# Altium PCB JacdacEc30TemplateRnd20x20+1+0 107.PcbDoc
Units mm, origin at the board's own origin, x right, y up, seen from the top; angles counter-clockwise.
Board outline 26.5 x 25 mm, 2 copper layers (Top Layer, Bottom Layer), stack 1.525 mm thick; 8 components, 3 nets, 30 pads, 1 vias.
Unrouted connection lines stored in the file: 9.
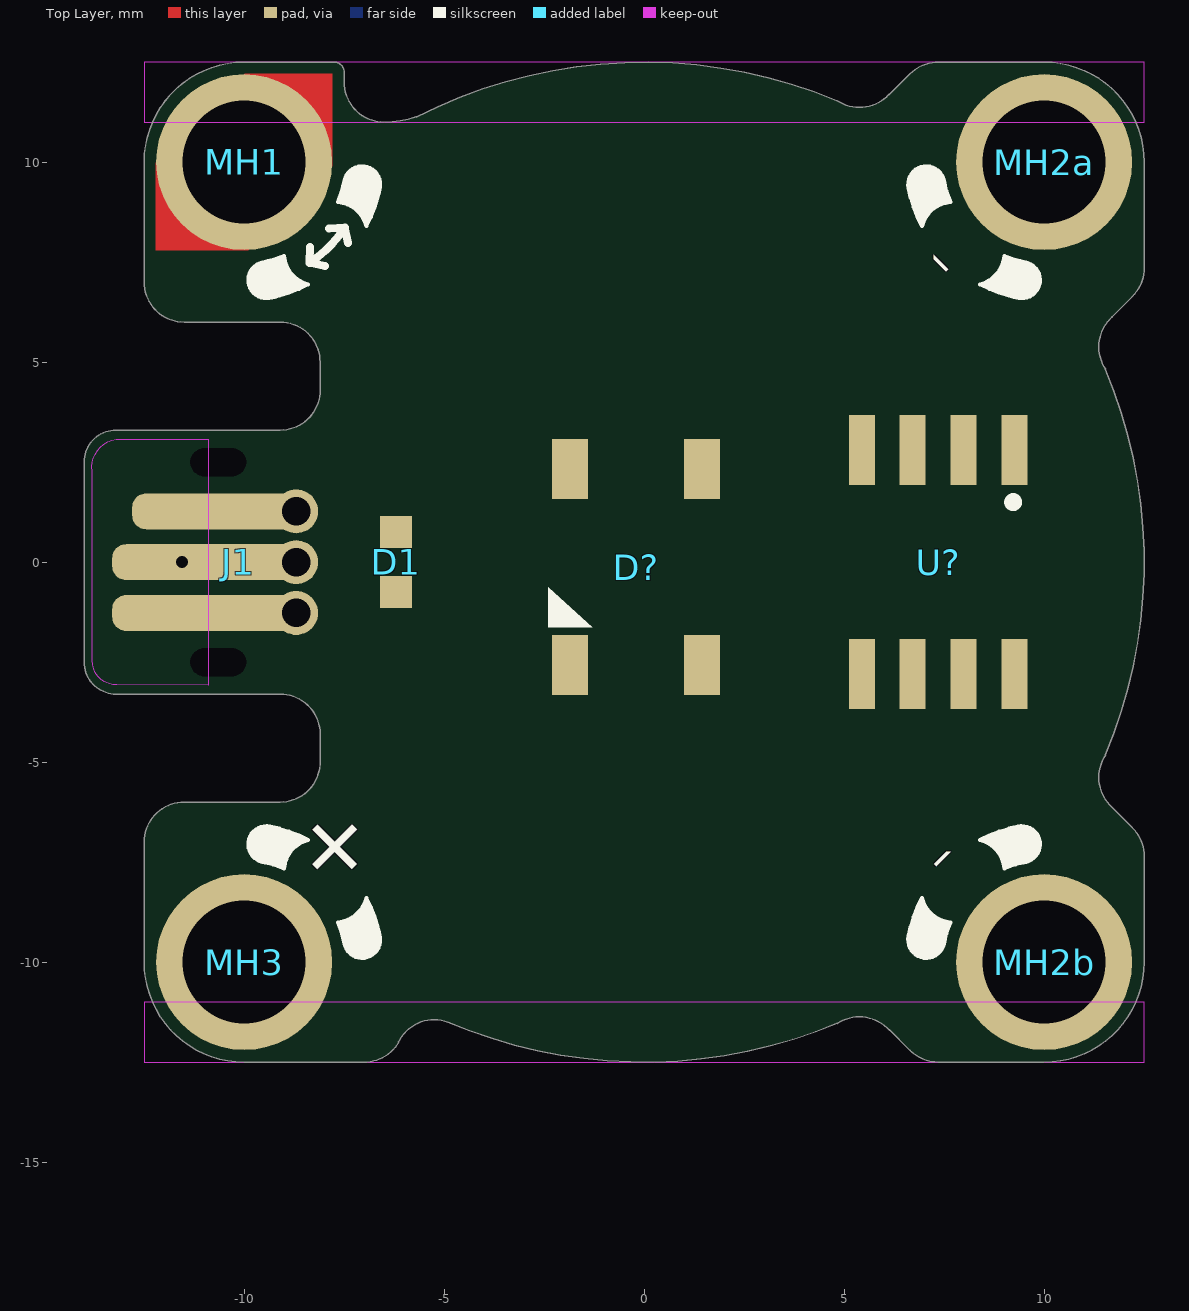
[diagram p0: Top Layer view]
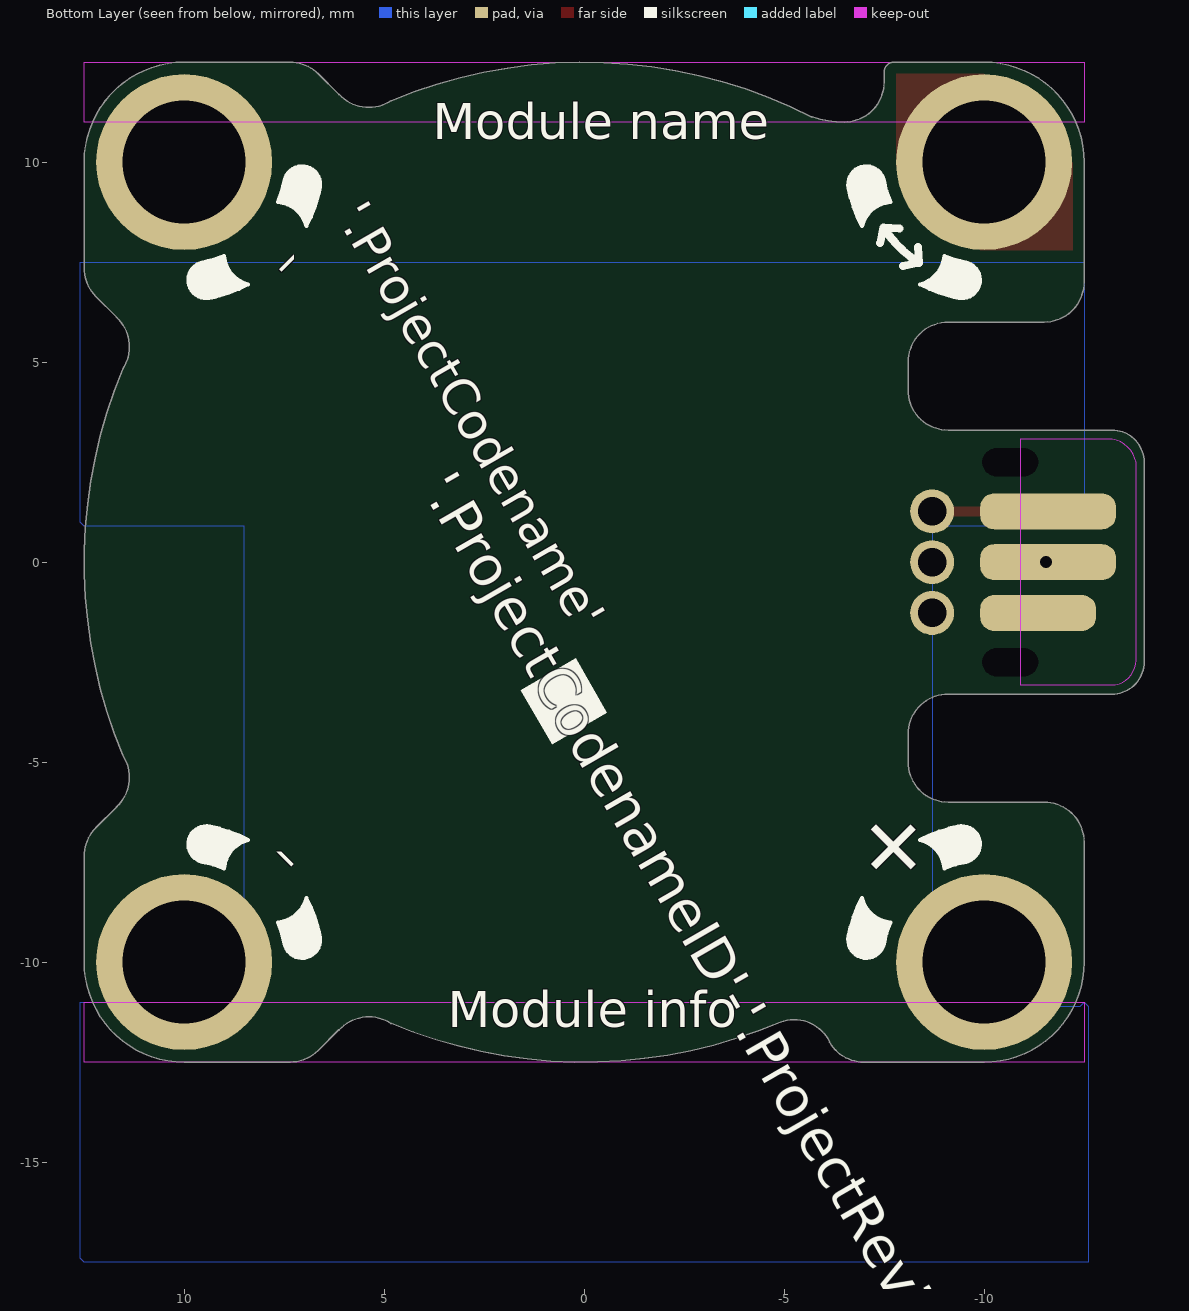
[diagram p1: Bottom Layer view, seen from below]
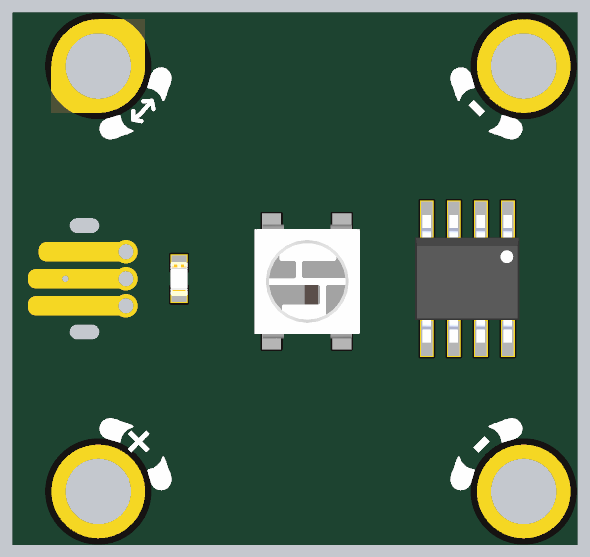
[diagram p2: 3D render of the assembled board from above, using the file's embedded part models]

## Layer stack, top to bottom
Top Solder: solder mask 0.0102, Solder Resist, Dk 3.5
Top Layer: signal copper 0.0356
Dielectric 1: core 1.454, FR-4, Dk 4.2
Bottom Layer: signal copper 0.0356
Bottom Solder: solder mask 0.0102, Solder Resist, Dk 3.5

## Board outline
-12.5,-7 cw(c-11.5,-7) -11.5,-6 -9.1,-6 ccw(c-9.1,-5) -8.1,-5 -8.1,-4.3 ccw(c-9.1,-4.3) -9.1,-3.3 -13.2,-3.3 cw(c-13.2,-2.5) -14,-2.5 -14,2.5 cw(c-13.2,2.5) -13.2,3.3 -9.1,3.3 -9.098,3.3 ccw(c-9.098,4.3) -8.098,4.3 -8.1,4.3 -8.1,5 ccw(c-9.1,5) -9.1,6 -11.5,6 cw(c-11.5,7) -12.5,7 -12.5,10 cw(c-10,10) -10,12.5 -7.75,12.5 cw(c-7.75,12.25) -7.5,12.25 -7.5,12 ccw(c-6.5,12) -6.5,11 ccw(c-6.5,13.5) -5.7,11.131 -5.698,11.126 cw(c0,0) 4.814,11.536 4.825,11.537 ccw(c5.383,12.367) 6.126,11.698 6.13,11.689 6.648,12.207 6.649,12.207 cw(c7.356,11.5) 7.356,12.5 7.35,12.5 10,12.5 cw(c10,10) 12.5,10 12.5,7.35 cw(c11.5,7.35) 12.207,6.643 11.694,6.13 11.698,6.126 ccw(c12.367,5.383) 11.537,4.825 11.532,4.823 cw(c0,0) 11.532,-4.823 11.537,-4.825 ccw(c12.367,-5.383) 11.698,-6.126 11.694,-6.13 12.207,-6.643 cw(c11.5,-7.35) 12.5,-7.35 12.5,-10 cw(c10,-10) 10,-12.5 7.35,-12.5 7.356,-12.5 cw(c7.356,-11.5) 6.649,-12.207 6.648,-12.207 6.133,-11.691 6.126,-11.698 ccw(c5.383,-12.367) 4.825,-11.537 4.823,-11.532 cw(c0,0) -4.904,-11.498 -4.905,-11.498 ccw(c-5.245,-12.438) -6.142,-11.996 -6.134,-12 cw(c-7,-11.5) -7,-12.5 -10,-12.5 cw(c-10,-10) -12.5,-10

## Design rules (kind name [scope] priority, off if disabled: settings)
AssemblyTestPointUsage [All] p1: valid=2
BoardOutlineClearance [not (HasFootprint('MOUSEBITE_CONNECTOR_3X2') or HasFootprint('MOUSEBITE_NOCONNECTOR_3'))] p1: gap=0.3 ignorepadtopadclearanceinfootprint=FALSE except(0: Arc-SplitContinuation Track-SplitContinuation SMDPad-SplitContinuation THPad-SplitContinuation Via-SplitContinuation Fill-SplitContinuation Poly-SplitContinuation Text-OutlineEdge Text-CavityEdge Text-CutoutEdge Text-SplitBarrior Text-SplitContinuation; 0.15: Region-OutlineEdge Region-CavityEdge Region-CutoutEdge Region-SplitBarrior Region-SplitContinuation)
Clearance [not (IsPad and HasFootprint('MOUSEBITE_CONNECTOR_3X2'))] p1: gap=0.15 ignorepadtopadclearanceinfootprint=FALSE except(0.254: Arc-Hole Track-Hole SMDPad-Hole THPad-Hole Via-Hole Fill-Hole Poly-Hole Region-Hole Text-Hole)
ComponentClearance [All] p1: gap=0.01 collisioncheckmode=3 verticalgap=0.2 showdistances=FALSE
DiffPairsRouting [All] p1: maxlimit=2 minlimit=0.15 mostfreqgap=0.15 toplayer_minwidth=0.15 toplayer_maxwidth=2 toplayer_prefwidth=0.15 bottomlayer_minwidth=0.15 bottomlayer_maxwidth=2 bottomlayer_prefwidth=0.15 substack1={CB9D278B-8BF5-444A-AAF4-837A2A9DF42D} toplayer_{cb9d278b-8bf5-444a-aaf4-837a2a9df42d}_minwidth=0.381 toplayer_{cb9d278b-8bf5-444a-aaf4-837a2a9df42d}_maxwidth=0.381 toplayer_{cb9d278b-8bf5-444a-aaf4-837a2a9df42d}_prefwidth=0.381 bottomlayer_{cb9d278b-8bf5-444a-aaf4-837a2a9df42d}_minwidth=0.381 bottomlayer_{cb9d278b-8bf5-444a-aaf4-837a2a9df42d}_maxwidth=0.381 bottomlayer_{cb9d278b-8bf5-444a-aaf4-837a2a9df42d}_prefwidth=0.381 substack2={826B8647-A721-4255-895A-19F9591B9CD1} toplayer_{826b8647-a721-4255-895a-19f9591b9cd1}_minwidth=0.381 toplayer_{826b8647-a721-4255-895a-19f9591b9cd1}_maxwidth=0.381 toplayer_{826b8647-a721-4255-895a-19f9591b9cd1}_prefwidth=0.381 bottomlayer_{826b8647-a721-4255-895a-19f9591b9cd1}_minwidth=0.381 bottomlayer_{826b8647-a721-4255-895a-19f9591b9cd1}_maxwidth=0.381 bottomlayer_{826b8647-a721-4255-895a-19f9591b9cd1}_prefwidth=0.381 substack3={E64FCAF4-1BC8-437D-B1E0-0E5F2DC0F59E} toplayer_{e64fcaf4-1bc8-437d-b1e0-0e5f2dc0f59e}_minwidth=0.381 toplayer_{e64fcaf4-1bc8-437d-b1e0-0e5f2dc0f59e}_maxwidth=0.381 toplayer_{e64fcaf4-1bc8-437d-b1e0-0e5f2dc0f59e}_prefwidth=0.381 bottomlayer_{e64fcaf4-1bc8-437d-b1e0-0e5f2dc0f59e}_minwidth=0.381 bottomlayer_{e64fcaf4-1bc8-437d-b1e0-0e5f2dc0f59e}_maxwidth=0.381 bottomlayer_{e64fcaf4-1bc8-437d-b1e0-0e5f2dc0f59e}_prefwidth=0.381 substack4={E61CE66C-507C-4E1E-8E83-C905434AFC1C} toplayer_{e61ce66c-507c-4e1e-8e83-c905434afc1c}_minwidth=0.381 toplayer_{e61ce66c-507c-4e1e-8e83-c905434afc1c}_maxwidth=0.381 toplayer_{e61ce66c-507c-4e1e-8e83-c905434afc1c}_prefwidth=0.381 bottomlayer_{e61ce66c-507c-4e1e-8e83-c905434afc1c}_minwidth=0.381 bottomlayer_{e61ce66c-507c-4e1e-8e83-c905434afc1c}_maxwidth=0.381 bottomlayer_{e61ce66c-507c-4e1e-8e83-c905434afc1c}_prefwidth=0.381 maxuncoupledlength=25
FabricationTestPointUsage [All] p1: valid=2 allowmultiple=FALSE
HoleSize [All] p1: absolutevalues=TRUE maxlimit=5 minlimit=0.3 maxpercent=80.000 minpercent=20.000
HoleToHoleClearance [IsPad and not (HasFootprint('MOUSEBITE_CONNECTOR_3X2') or HasFootprint('MOUSEBITE_NOCONNECTOR_3')) vs IsPad and not  (HasFootprint('MOUSEBITE_CONNECTOR_3X2') or HasFootprint('MOUSEBITE_NOCONNECTOR_3'))] p1: gap=0.5 allowstackedmicrovias=TRUE
MinimumAnnularRing [All] p1: minimumring=0.15
MinimumSolderMaskSliver [All] p1: minsoldermaskwidth=0.005
PlaneClearance [All] p1: clearance=0.3
PlaneConnect [All] p1: planeconnectstyle=Relief reliefexpansion=0.5 reliefentries=4 reliefconductorwidth=0.2 reliefairgap=0.3
PolygonConnect "PolygonConnect GND" [isVIA] p1: connectstyle=Relief reliefconductorwidth=0.2 reliefentries=4 polygonreliefangle="90 Angle" airgapwidth=0.2
PolygonConnect [All] p2: connectstyle=Relief reliefconductorwidth=0.2 reliefentries=4 polygonreliefangle="90 Angle" airgapwidth=0.2
RoutingVias [All] p1: holewidth=0.3 width=0.6 viastyle="Through Hole" minholewidth=0.3 minwidth=0.6 maxholewidth=0.3 maxwidth=0.8
SilkToSilkClearance [All] p1: silktosilkclearance=0.001
SilkToSolderMaskClearance [IsPad] p1: minsilkscreentomaskgap=0.05 clearancetoexposedcopper=TRUE
SolderMaskExpansion [All] p1: expansion=0.075 istentingtop=FALSE
UnRoutedNet [All] p1: checkbadconnections=TRUE
Width [All] p1: maxlimit=2 minlimit=0.15 preferedwidth=0.15 substack1={CB9D278B-8BF5-444A-AAF4-837A2A9DF42D} substack2={826B8647-A721-4255-895A-19F9591B9CD1} substack3={E64FCAF4-1BC8-437D-B1E0-0E5F2DC0F59E} substack4={E61CE66C-507C-4E1E-8E83-C905434AFC1C} minimp=50.000000 maximp=50.000000 favimp=50.000000
18 further rules are at their usual default settings.

## Classes and differential pairs
component class "JacdacEc30Template30x30 105": D1 J1 MH1 MH2a MH2b MH3 U?

## Components (designator, comment, footprint, x,y, rotation, side; value= is the part's Value field where it differs from the comment)
D1 "Everlight Elec'''" "0603 Orange" -6.2,0 r270 top
D? "WS2812E" WS2812E-5050 -0.2,-0.125 r270 top
J1 "Jacdac edge connector" JACDAC_EDGE_CONNECTOR_NO_TRACES_V2DIMS -8.15,0 r90 top
MH1 "MH_6.5MMK_4.5MMC_3.0MMD_PTH" MH_6.5MMK_4.5MMC_3.0MMD_PTH -10,10 r90 top
MH2a "MH_6.5MMK_4.5MMC_3.0MMD_PTH" MH_6.5MMK_4.5MMC_3.0MMD_PTH 10,10 r90 top
MH2b "MH_6.5MMK_4.5MMC_3.0MMD_PTH" MH_6.5MMK_4.5MMC_3.0MMD_PTH 10,-10 r90 top
MH3 "MH_6.5MMK_4.5MMC_3.0MMD_PTH" MH_6.5MMK_4.5MMC_3.0MMD_PTH -10,-10 r90 top
U? "STM32G031J6M6" 8-SOIC 7.35,0 r270 top

## Footprints (in the part's own frame and the unit in brackets; to place one, negate y for a bottom-side part, rotate by r counter-clockwise, add the part's x,y. Pads: shape width x height; smd on the part's side, far side on the other; paste and mask are expansions set on the pad)
8-SOIC [mm] "0.154\", 3.90mm Width"
  rect 1.75x0.65 smd paste-0.05: 1(-2.8,1.905) 2(-2.8,0.635) 3(-2.8,-0.635) 4(-2.8,-1.905) 5(2.8,-1.905) 6(2.8,-0.635) 7(2.8,0.635) 8(2.8,1.905)
  silkscreen extent -1.6,1.78 -1.4,1.97, body extent -3,-2.45 3,2.45, height 1.75
"0603 Orange" [mm]
  rect 0.8x0.8 smd paste-0.05: 1(-0.75,0) 2(0.75,0)
  body extent -0.79,-0.4 0.81,0.4, height 0.4
JACDAC_EDGE_CONNECTOR_NO_TRACES_V2DIMS [mm] "Jacdac 3 pin connector with no traces and new slot definition"
  rrect78% 0.9x2.9 smd far side paste-1 mask+0: 1(-1.27,3.2)
  rrect78% 0.9x4.3 smd paste-1 mask+0: 1(1.27,2.5)
  round 1.1 hole 0.71 paste-0.254 mask+0: 1(1.27,0.55) 2(0,0.55) 3(-1.27,0.55)
  rrect78% 0.9x3.4 smd far side paste-1 mask+0: 2(0,3.45) 2(0,3.45) 3(1.27,3.45)
  rrect78% 0.9x4.8 smd paste-1 mask+0: 2(0,2.75) 3(-1.27,2.75)
  round 0 hole 0.7 slot 1.4 at 90 deg unplated: ""(-2.5,2.5) ""(2.5,2.5)
  Top Layer keep-out region: -3.075,2.75 -3.07,5.033 -2.987,5.341 -2.761,5.567 -2.453,5.65 -2.453,5.65 2.27,5.65 2.545,5.635 2.794,5.516 2.978,5.31 3.07,5.05 3.07,5.05 3.07,2.75
  Bottom Layer lines w0.2: -1.27,0.85 -1.126,0.85
  Bottom Layer keep-out region: -3.07,2.75 -3.07,5.033 -3.023,5.269 -2.889,5.469 -2.689,5.603 -2.453,5.65 -2.453,5.65 2.27,5.65 2.546,5.635 2.794,5.516 2.978,5.31 3.07,5.05 3.07,5.05 3.07,2.75
MH_6.5MMK_4.5MMC_3.0MMD_PTH [mm] "Jacdac mounting hole 6.5mm clearance, 4.5 annualar ring and 3.0mm PTH"
  round 4.4 hole 3.08 mask+0.3: 1(0,0)
WS2812E-5050 [mm] "SMD-5050 Light Emitting Diodes"
  rect 1.5x0.9 smd: 1(-2.45,1.65) 2(-2.45,-1.65) 3(2.45,-1.65) 4(2.45,1.65)
  silkscreen extent 0.5,-2.2 1.5,-1.1, body extent -2.68,-2.45 2.67,2.5, height 1.5

## Part data
D1: library part 19-217/S2C-AQ1R1B/3T, "LED ORANGE DIFFUSED 0603 SMD", Case Code (Imperial)=0603, Color=Orange, Manufacturer="Everlight Elec", Supplier 1 Part Number=C146215, Case/Package=0603, Colour=Orange, ComponentLink1Description="Online datasheet", ComponentLink1URL=https://datasheet.lcsc.com/lcsc/1912171731_Everlight-Elec-19-217-S2C-AQ1R1B-3T_C146215.pdf, Manufacturer Part Number=19-217/S2C-AQ1R1B/3T, Mount="Surface Mount", Supplier 1=LCSC
D?: library part WS2812E-5050, "WS2812E 5050 RGB LED WITH INTEGRATED DRIVER", Color=Blue,Green,Red, Manufacturer=Worldsemi, Supplier 1 Part Number 3=C139127, Category=LEDs, ComponentLink1Description="Online datasheet", ComponentLink1URL=https://datasheet.lcsc.com/lcsc/1811151230_Worldsemi-WS2812E_C139127.pdf, Length=5mm, Manufacturer Part Number=WS2812E, Mount="Surface Mount", RoHS=Yes, Supplier 1=LCSC, Width=5mm
J1: "3 pin Jacdac edge connector 1.27mm pitch", Manufacturer Part Number=JACDAC_EDGE_CONNECTOR, Checked By=?, ComponentLink1Description="Yuliang JACDAC cable connector drawing online", ComponentLink1URL=https://github.com/microsoft/jacdac-mdk/blob/main/connector/JACDAC-Connector-by-Yuliang-2020-11-28.pdf, ComponentLink2Description="JACDAC PCB edge connector spec onlin", ComponentLink2URL=https://github.com/microsoft/jacdac-mdk/blob/main/connector/JACDAC_PCB_Edge_Connector_Drawing_JD-PEC-01_rev_01.pdf, Created By="D. Gakure", PCB Type="1.6mm FR4"
MH1 MH2a MH2b MH3: "Mounting Hole 6.5mm keepout, 4.5mm annualar ring and 3.0mm Drill PTH"
U?: "MCU 32-bit ARM Cortex M0+ RISC 32KB Flash 2.5V/3.3V 8-Pin SO N Tube", Manufacturer=STMicroelectronics, Supplier Part Number 1=497-19552-ND, Category=Microcontrollers, Checked By=?, ComponentLink1Description="Online datasheet", ComponentLink1URL=https://www.st.com/resource/en/datasheet/stm32g031c6.pdf, Created By="D. Gakure", Manufacturer Part Number=STM32G031J6M6, Pricing 1="1=1.80000, 10=1.61600, 25=1.52480, 100=1.29920, 250=1.21992, 500=1.06744, 1000=0.88952 (USD)", Pricing 2="1=1.91000, 25=1.70000, 75=1.63000, 150=1.59000, 400=1.53000 (USD)", Pricing 3="1=1.50000, 10=1.28000, 50=1.28000, 100=1.09000, 1000=0.73700, 10000=0.71100 (USD)", RoHS=Yes, Supplier 1=Digi-Key, Supplier 2="Future Electronics", Supplier 3=Mouser, Supplier Part Number 2=2116576, Supplier Part Number 3=511-STM32G031J6M6

## Via types
v1: diameter 0.6, hole 0.3, Top Layer to Bottom Layer, tented both sides, 1 vias

## Nets (pads, with @x,y where several pads share a name; then routed paths per layer and width w, separated by ;. In a path a pad name is that pad's centre, name@x,y a point inside that pad or via, vN(x,y) a via of type N, cw(c..) or ccw(c..) an arc to the next point about the centre after c; other vN are vias at no path point)
GND: J1.2 MH2a.1 MH2b.1
  other v1: -11.55,0
JD_DATA: J1.1 MH1.1 | length 2
  Top Layer w0.25: J1.1@-10.65,1.27 J1.1@-8.7,1.27
JD_PWR: J1.3 MH3.1
pads on no net: D1.1 D1.2 D?.1 D?.2 D?.3 D?.4 J1. U?.1 U?.2 U?.3 U?.4 U?.5 U?.6 U?.7 U?.8

## Polygon pours and split planes (outlines as drawn)
no net on Bottom Assy "NONET_L-01_P-001" (solid): 10,7.8 ccw(c10,10) 12.2,10 ccw(c10,10) 10,12.2 ccw(c10,10) 7.8,10 ccw(c10,10)
no net on Bottom Assy "NONET_L-01_P-001" (solid): 10,-12.2 ccw(c10,-10) 12.2,-10 ccw(c10,-10) 10,-7.8 ccw(c10,-10) 7.8,-10 ccw(c10,-10)
no net on Bottom Assy "NONET_L-01_P-001" (solid): -10,7.8 ccw(c-10,10) -7.8,10 ccw(c-10,10) -10,12.2 ccw(c-10,10) -12.2,10 ccw(c-10,10)
no net on Bottom Assy "NONET_L-01_P-001" (solid): -12.449,-0.82 ccw(c-12.449,-1.171) -12.8,-1.171 -12.8,-1.369 ccw(c-12.449,-1.369) -12.449,-1.72 -9.016,-1.72 ccw(c-8.7,-1.27) -9.016,-0.82
no net on Bottom Assy "NONET_L-01_P-001" (solid): -12.949,-0.82 ccw(c-12.949,-1.171) -13.3,-1.171 -13.3,-1.369 ccw(c-12.949,-1.369) -12.949,-1.72 -9.016,-1.72 ccw(c-8.7,-1.27) -9.016,-0.82
no net on Bottom Assy "NONET_L-01_P-001" (solid): -12.949,-0.82 ccw(c-12.949,-1.171) -13.3,-1.171 -13.3,-1.369 ccw(c-12.949,-1.369) -12.949,-1.72 -9.016,-1.72 ccw(c-8.7,-1.27) -9.016,-0.82
no net on Bottom Assy "NONET_L-01_P-001" (solid): -10,-12.2 ccw(c-10,-10) -7.8,-10 ccw(c-10,-10) -10,-7.8 ccw(c-10,-10) -12.2,-10 ccw(c-10,-10)
no net on Bottom Assy "NONET_L-01_P-001" (solid): -9.9,7.8 -7.8,9.9 -7.8,12.215 -9.985,12.215 -12.215,9.985 -12.215,7.8
no net on Bottom Assy "NONET_L-01_P-001" (hatched 45Degree grid 0.3 track 0.01): -12.5,-10 -12.5,-7.018 -12.5,-7 cw(c-11.5,-7) -11.5,-6 -9.1,-6 ccw(c-9.1,-5) -8.1,-5 -8.1,-4.3 ccw(c-9.1,-4.3) -9.1,-3.3 -13.2,-3.3 cw(c-13.2,-2.5) -14,-2.5 -14,2.5 cw(c-13.2,2.5) -13.2,3.3 -9.1,3.3 ccw(c-9.1,4.3) -8.1,4.3 -8.1,5 ccw(c-9.1,5) -9.1,6 -11.5,6 cw(c-11.5,7) -12.5,7 -12.5,7.003 -12.5,10 cw(c-10,10) -10,12.5 -7.729,12.5 -7.75,12.5 cw(c-7.75,12.25) -7.5,12.25 -7.5,12 ccw(c-6.5,12) -6.656,11.012 -6.65,11.015 cw(c-10,10) -7,8.197 -7,-8.197 cw(c-10,-10) -6.646,-11 6.646,-11 cw(c10,-10) 12.503,-7.554 12.5,-7.554 12.5,-10 cw(c10,-10) 10,-12.5 -7.729,-12.5 -10,-12.5 cw(c-10,-10)
no net on Bottom Assy "NONET_L-01_P-001" (hatched 45Degree grid 0.3 track 0.01): -6.5,11 ccw(c-6.5,12) -5.5,12 -5.5,12.25 cw(c-5.25,12.25) -5.25,12.5 10,12.5 cw(c10,10) 12.5,10 12.5,7.554 12.503,7.554 cw(c10,10) 6.646,11
no net on Bottom Assy "NONET_L-01_P-001" (hatched 45Degree grid 0.3 track 0.01, shelved): 10,-17.5 ccw(c10,-15) 12.5,-15 12.5,-11.974 ccw(c11.5,-11.974) 11.5,-10.974 9.148,-10.974 9.15,-10.975 cw(c9.15,-9.975) 8.15,-9.975 8.15,-9.974 8.15,-9.274 cw(c9.15,-9.274) 9.15,-8.274 9.148,-8.274 13.198,-8.274 13.2,-8.274 ccw(c13.2,-7.474) 14,-7.474 14,-2.534 ccw(c13.2,-2.534) 13.2,-1.734 9.15,-1.734 cw(c9.15,-0.734) 8.15,-0.734 8.15,-0.034 cw(c9.15,-0.034) 9.15,0.966 11.5,0.966 ccw(c11.5,1.966) 12.5,1.966 12.5,5 ccw(c10,5) 10,7.5 -5.225,7.5 -5.25,7.5 ccw(c-5.25,7.25) -5.5,7.25 -5.5,7 cw(c-6.5,7) -6.5,6 6.646,6 ccw(c10,5) 7,3.197 7,-13.197 ccw(c10,-15) 6.646,-16 -6.646,-16 ccw(c-10,-15) -7,-13.197 -7,3.197 ccw(c-10,5) -6.65,6.015 -6.656,6.012 cw(c-6.5,7) -7.5,7 -7.5,7.25 ccw(c-7.75,7.25) -7.75,7.5 -7.729,7.5 -10,7.5 ccw(c-10,5) -12.5,5 -12.5,1.974 ccw(c-11.5,1.974) -11.5,0.974 -9.148,0.974 cw(c-9.148,-0.026) -8.148,-0.026 -8.15,-0.726 cw(c-9.15,-0.726) -9.15,-1.726 -9.148,-1.726 -13.198,-1.726 -13.2,-1.726 ccw(c-13.2,-2.526) -14,-2.526 -14,-7.47 -14,-7.474 ccw(c-13.2,-7.474) -13.2,-8.274 -13.198,-8.274 -9.148,-8.274 -9.15,-8.274 cw(c-9.15,-9.274) -8.15,-9.274 -8.148,-9.97 -8.148,-9.974 cw(c-9.148,-9.974) -9.148,-10.974 -11.5,-10.974 ccw(c-11.5,-11.974) -12.5,-11.974 -12.5,-15 ccw(c-10,-15) -10,-17.5 -7.729,-17.5
no net on Bottom Assy "NONET_L-01_P-001" (solid): 10,7.8 cw(c10,10) 7.8,10 cw(c10,10) 10,12.2 cw(c10,10) 12.2,10 cw(c10,10)
no net on Bottom Assy "NONET_L-01_P-001" (solid): 10,-12.2 cw(c10,-10) 7.8,-10 cw(c10,-10) 10,-7.8 cw(c10,-10) 12.2,-10 cw(c10,-10)
no net on Bottom Assy "NONET_L-01_P-001" (solid): -10,-12.2 ccw(c-10,-10) -7.8,-10 ccw(c-10,-10) -10,-7.8 ccw(c-10,-10) -12.2,-10 ccw(c-10,-10)
no net on Bottom Assy "NONET_L-01_P-001" (solid): -10,7.8 ccw(c-10,10) -7.8,10 ccw(c-10,10) -10,12.2 ccw(c-10,10) -12.2,10 ccw(c-10,10)
no net on Bottom Layer "NONET_L02_P000" (solid, shelved, pour order 0): -12.5,7.5 -12.5,0.9 -8.724,0.9 -8.675,0.851 -8.7,0.826 -8.7,-11.1 -12.4,-11.1 -12.5,-11 -12.6,-11.1 -12.6,-17.5 12.5,-17.5 12.6,-17.4 12.6,-11 8.7,-11 8.5,-10.8 8.5,0.9 12.5,0.9 12.6,1 12.6,7.5
no net on Bottom Assy "NONET_L-01_P-001" (hatched 45Degree grid 0.15 track 0.01): -13.6,-2.468 ccw(c-13.2,-2.468) -13.2,-2.868 -9.3,-2.868 -9.3,2.874 -13.198,2.874 -13.2,2.874 ccw(c-13.2,2.474) -13.6,2.474 -13.6,2.477
no net on Bottom Assy "NONET_L-01_P-001" (hatched 45Degree grid 0.15 track 0.01): -12.5,8.342 ccw(c-10,10) -8.342,12.5 -10,12.5 ccw(c-10,10) -12.5,10
no net on Bottom Assy "NONET_L-01_P-001" (hatched 45Degree grid 0.15 track 0.01): -12.5,-8.342 cw(c-10,-10) -8.342,-12.5 -10,-12.5 cw(c-10,-10) -12.5,-10
no net on Bottom Assy "NONET_L-01_P-001" (hatched 45Degree grid 0.15 track 0.01): 8.342,-12.5 10,-12.5 ccw(c10,-10) 12.5,-10 12.5,-8.342 ccw(c10,-10)
no net on Bottom Assy "NONET_L-01_P-001" (hatched 45Degree grid 0.15 track 0.01): 8.342,12.5 ccw(c10,10) 12.5,8.342 12.5,10 ccw(c10,10) 10,12.5

## Keep-outs
Keep-Out Layer:
  region: 12.5,-12.5 12.5,-11 -12.5,-11 -12.5,-12.5
  region: 12.5,11 12.5,12.5 -12.5,12.5 -12.5,11

## Other copper
Top Layer:
  region net JD_DATA: -12.215,7.8 -9.9,7.8 -7.8,9.9 -7.8,12.215 -9.985,12.215 -12.215,9.985
  text "Top Layer" at 14.701,16.75 h1.7
Bottom Layer:
  pour cut-out: 10,-12.5 ccw(c10,-10) 12.5,-10 ccw(c10,-10) 10,-7.5 ccw(c10,-10) 7.5,-10 ccw(c10,-10)
  pour cut-out: 10,7.5 ccw(c10,10) 12.5,10 ccw(c10,10) 10,12.5 ccw(c10,10) 7.5,10 ccw(c10,10)
  pour cut-out: -10,7.5 ccw(c-10,10) -7.5,10 ccw(c-10,10) -10,12.5 ccw(c-10,10) -12.5,10 ccw(c-10,10)
  pour cut-out: -10,-12.5 ccw(c-10,-10) -7.5,-10 ccw(c-10,-10) -10,-7.5 ccw(c-10,-10) -12.5,-10 ccw(c-10,-10)
  text "Bottom Layer" at 14.7,15.25 h1.7

## Silkscreen, mask and mechanical layers (free items; w line width, h text height)
Top Overlay:
  lines w0.1: -9.374,-6.607 cw(c-10,-10) -8.399,-6.944 ccw(c-8.206,-7.72) -9.003,-7.653 ; -9.374,6.607 ccw(c-10,10) -8.399,6.944 cw(c-8.206,7.72) -9.003,7.653 ; -9.352,-6.612 ccw(c-9.446,-7.052) -9.539,-7.492 cw(c-10,-10) -9.027,-7.643 ; -9.352,6.612 cw(c-9.446,7.052) -9.539,7.492 ccw(c-10,10) -9.027,7.643 ; -7.653,-9.003 ccw(c-7.72,-8.206) -6.944,-8.399 cw(c-10,-10) -6.607,-9.374 ; -7.653,9.003 cw(c-7.72,8.206) -6.944,8.399 ccw(c-10,10) -6.607,9.374 ; -7.643,-9.027 cw(c-10,-10) -7.492,-9.539 ccw(c-7.052,-9.446) -6.612,-9.352 ; -7.643,9.027 ccw(c-10,10) -7.492,9.539 cw(c-7.052,9.446) -6.612,9.352 ; 6.607,-9.374 cw(c10,-10) 6.944,-8.399 ccw(c7.72,-8.206) 7.653,-9.003 ; 6.607,9.374 ccw(c10,10) 6.944,8.399 cw(c7.72,8.206) 7.653,9.003 ; 6.612,-9.352 ccw(c7.052,-9.446) 7.492,-9.539 cw(c10,-10) 7.643,-9.027 ; 6.612,9.352 cw(c7.052,9.446) 7.492,9.539 ccw(c10,10) 7.643,9.027 ; 9.003,-7.653 ccw(c8.206,-7.72) 8.399,-6.944 cw(c10,-10) 9.374,-6.607 ; 9.003,7.653 cw(c8.206,7.72) 8.399,6.944 ccw(c10,10) 9.374,6.607 ; 9.027,-7.643 cw(c10,-10) 9.539,-7.492 ccw(c9.446,-7.052) 9.352,-6.612 ; 9.027,7.643 ccw(c10,10) 9.539,7.492 cw(c9.446,7.052) 9.352,6.612
  lines w0.2: -8.352,7.884 -8.366,7.484 ; -7.973,7.408 -8.366,7.484 ; -7.883,8.345 -7.484,8.366 ; -7.401,7.975 -7.484,8.366 ; -8.366,7.484 ccw(c-10,10) -7.484,8.366
  lines w0.33: -9.1,-7.445 cw(c-8.759,-7.302) -8.685,-6.94 ; -9.1,7.445 ccw(c-8.759,7.302) -8.685,6.94 ; -7.445,-9.1 ccw(c-7.302,-8.759) -6.94,-8.685 ; -7.445,9.1 cw(c-7.302,8.759) -6.94,8.685 ; 6.94,-8.685 ccw(c7.302,-8.759) 7.445,-9.1 ; 6.94,8.685 cw(c7.302,8.759) 7.445,9.1 ; 8.685,-6.94 cw(c8.759,-7.302) 9.1,-7.445 ; 8.685,6.94 ccw(c8.759,7.302) 9.1,7.445
  lines w1: -9.43,-7.055 cw(c-10,-10) -9.285,-7.086 ; -9.43,7.055 ccw(c-10,10) -9.285,7.086 ; -7.086,-9.285 cw(c-10,-10) -7.055,-9.43 ; -7.086,9.285 ccw(c-10,10) -7.055,9.43 ; 7.055,-9.43 cw(c10,-10) 7.086,-9.285 ; 7.055,9.43 ccw(c10,10) 7.086,9.285 ; 9.285,-7.086 cw(c10,-10) 9.43,-7.055 ; 9.285,7.086 ccw(c10,10) 9.43,7.055
  text "Top Overlay" at 14.701,11.1 h1.7
  text "-" at 8.643,8.146 h3.5 r135
  text "-" at 8.146,-8.643 h3.5 r45
  text "+" at -7.95,-8.67 h2.8 r315
Bottom Overlay:
  region: 0.803,-4.559 1.59,-3.195 0.211,-2.399 -0.576,-3.763
  lines w0.1: -9.374,-6.607 cw(c-10,-10) -8.399,-6.944 ccw(c-8.206,-7.72) -9.003,-7.653 ; -9.374,6.607 ccw(c-10,10) -8.399,6.944 cw(c-8.206,7.72) -9.003,7.653 ; -9.352,-6.612 ccw(c-9.446,-7.052) -9.539,-7.492 cw(c-10,-10) -9.027,-7.643 ; -9.352,6.612 cw(c-9.446,7.052) -9.539,7.492 ccw(c-10,10) -9.027,7.643 ; -7.653,-9.003 ccw(c-7.72,-8.206) -6.944,-8.399 cw(c-10,-10) -6.607,-9.374 ; -7.653,9.003 cw(c-7.72,8.206) -6.944,8.399 ccw(c-10,10) -6.607,9.374 ; -7.643,-9.027 cw(c-10,-10) -7.492,-9.539 ccw(c-7.052,-9.446) -6.612,-9.352 ; -7.643,9.027 ccw(c-10,10) -7.492,9.539 cw(c-7.052,9.446) -6.612,9.352 ; 6.607,-9.374 cw(c10,-10) 6.944,-8.399 ccw(c7.72,-8.206) 7.653,-9.003 ; 6.607,9.374 ccw(c10,10) 6.944,8.399 cw(c7.72,8.206) 7.653,9.003 ; 6.612,-9.352 ccw(c7.052,-9.446) 7.492,-9.539 cw(c10,-10) 7.643,-9.027 ; 6.612,9.352 cw(c7.052,9.446) 7.492,9.539 ccw(c10,10) 7.643,9.027 ; 9.003,-7.653 ccw(c8.206,-7.72) 8.399,-6.944 cw(c10,-10) 9.374,-6.607 ; 9.003,7.653 cw(c8.206,7.72) 8.399,6.944 ccw(c10,10) 9.374,6.607 ; 9.027,-7.643 cw(c10,-10) 9.539,-7.492 ccw(c9.446,-7.052) 9.352,-6.612 ; 9.027,7.643 ccw(c10,10) 9.539,7.492 cw(c9.446,7.052) 9.352,6.612
  lines w0.2: -8.352,7.884 -8.366,7.484 ; -7.973,7.408 -8.366,7.484 ; -7.883,8.345 -7.484,8.366 ; -7.401,7.975 -7.484,8.366 ; -8.366,7.484 ccw(c-10,10) -7.484,8.366
  lines w0.33: -9.1,-7.445 cw(c-8.759,-7.302) -8.685,-6.94 ; -9.1,7.445 ccw(c-8.759,7.302) -8.685,6.94 ; -7.445,-9.1 ccw(c-7.302,-8.759) -6.94,-8.685 ; -7.445,9.1 cw(c-7.302,8.759) -6.94,8.685 ; 6.94,-8.685 ccw(c7.302,-8.759) 7.445,-9.1 ; 6.94,8.685 cw(c7.302,8.759) 7.445,9.1 ; 8.685,-6.94 cw(c8.759,-7.302) 9.1,-7.445 ; 8.685,6.94 ccw(c8.759,7.302) 9.1,7.445
  lines w1: -9.43,-7.055 cw(c-10,-10) -9.285,-7.086 ; -9.43,7.055 ccw(c-10,10) -9.285,7.086 ; -7.086,-9.285 cw(c-10,-10) -7.055,-9.43 ; -7.086,9.285 ccw(c-10,10) -7.055,9.43 ; 7.055,-9.43 cw(c10,-10) 7.086,-9.285 ; 7.055,9.43 ccw(c10,10) 7.086,9.285 ; 9.285,-7.086 cw(c10,-10) 9.43,-7.055 ; 9.285,7.086 ccw(c10,10) 9.43,7.055
  text "Bottom Overlay" at 23.3,16.725 h1.7
  text "Module name" at 3.781,10.57 h0.9
  text "'.ProjectCodename'" at 6.224,8.668 h0.9 r60
  text "-" at 8.643,8.146 h3.5 r135
  text "'.ProjectCodenameID'-'.ProjectRevision'" at 4.091,1.871 h1 r60
  text "-" at 8.146,-8.643 h3.5 r45
  text "+" at -7.95,-8.67 h2.8 r315
  text "Module info" at 3.413,-11.63 h0.9
Top Paste:
  text "Top Paste" at 23.301,15.318 h1.7
Bottom Paste:
  text "Bottom Paste" at 23.3,13.84 h1.7
Top Solder:
  text "Top Solder (resist)" at 23.301,12.518 h1.7
Bottom Solder:
  text "Bottom Solder (resist)" at 23.3,11.027 h1.7
Drill Guide:
  text "Drill Guide" at 36.725,12.515 h1.7
Dimension:
  circle w0.1: c10,-10 r2.2
  circle w0.1: c-10,-10 r3.5
  text "Dimension" at 36.725,13.815 h1.7
Fabrication notes:
  lines w0.1: -14.7,-0.2 -12.4,-2.5 -11.9,-2.5 -10.65,-2.5 ; -14.7,0.2 -12.4,2.5 -11.9,2.5 -10.65,2.5 ; -10.629,20.05 -10.979,20.4 ; -10.629,20.75 -10.979,20.4 ; -8,20.4 -10.979,20.4 ; -7.992,21 -7.987,-14.5
  text "Fabrication Notes" at 36.725,16.715 h1.7
  text "no board edge pips/ / rat's teeth/mouse bites  / left of this line - make  / sure board edge is clean" at -24.497,14.4 h1.7
  text "non-plated slots x2" at -25.599,-0.407 h1.7
Top Component Center:
  lines w0.2: -6.7,0 -5.7,0 ; -6.2,-0.5 -6.2,0.5
Alignment:
  circle w0.1: c10,10 r2.5
Mechanical 9:
  lines w0.01: 45.77,-18.4 ccw(c43.445,-18.4) 45.77,-18.355 ; 45.77,-13.595 ccw(c43.445,-13.55) 45.77,-13.55
Board Outline:
  lines w0.2: -9.1,-3.3 -13.2,-3.3 cw(c-13.2,-2.5) -14,-2.5 -14,2.5 cw(c-13.2,2.5) -13.2,3.3 -9.1,3.3 ; -9.1,-3.3 cw(c-9.1,-4.3) -8.1,-4.3 -8.1,-5 cw(c-9.1,-5) -9.1,-6 -11.5,-6 ccw(c-11.5,-7) -12.5,-7 -12.5,-10 ccw(c-10,-10) -10,-12.5 -7.3,-12.5 ccw(c-7.3,-11.5) -6.593,-12.207 ; -9.098,3.3 ccw(c-9.098,4.3) -8.098,4.3 ; -8.1,4.3 -8.1,5 ccw(c-9.1,5) -9.1,6 -11.5,6 cw(c-11.5,7) -12.5,7 -12.5,10 cw(c-10,10) -10,12.5 -7.75,12.5 cw(c-7.75,12.25) -7.5,12.25 -7.5,12 ccw(c-6.5,12) -6.5,11 ccw(c-6.5,13.5) -5.7,11.131 ; -6.6,-12.21 -6.11,-11.718 ; -6.112,-11.716 cw(c-5.369,-12.385) -4.946,-11.479 ; -5.698,11.126 cw(c0,0) 4.947,11.48 ccw(c5.369,12.385) 6.112,11.716 ; -4.904,-11.498 ccw(c0,0) 4.947,-11.48 ; 4.946,-11.479 cw(c5.369,-12.385) 6.112,-11.716 ; 6.11,-11.718 6.6,-12.21 ; 6.11,11.718 6.6,12.21 ; 6.593,-12.207 ccw(c7.3,-11.5) 7.3,-12.5 10,-12.5 ccw(c10,-10) 12.5,-10 12.5,-7.3 ccw(c11.5,-7.3) 12.207,-6.593 ; 6.593,12.207 cw(c7.3,11.5) 7.3,12.5 10,12.5 cw(c10,10) 12.5,10 12.5,7.3 cw(c11.5,7.3) 12.207,6.593 ; 11.479,-4.946 ccw(c12.385,-5.369) 11.716,-6.112 ; 11.479,4.946 cw(c12.385,5.369) 11.716,6.112 ; 11.48,-4.947 ccw(c0,0) 11.48,4.947 ; 11.718,-6.11 12.21,-6.6 ; 11.718,6.11 12.21,6.6
  text "Board Outline" at 36.725,15.315 h1.7
Top Assy:
  text "Top Assy" at 14.701,13.925 h1.7
Bottom Assy:
  text "Bottom Assy" at 14.7,12.525 h1.7
Drill Drawing:
  text "Drill Drawing" at 36.725,11.01 h1.7
Assembly Notes:
  lines w0.05: -12.504,-12.031 -12.504,12.031 ; -12.504,-7.031 -7.15,-7.031 ; -12.504,7.031 -7.15,7.031 ; -7.15,-12.031 -7.15,12.031
Top Dwg:
  circle w0.025: c10,-10 r2.5
  circle w0.025: c10,10 r1.515
  circle w0.025: c10,10 r2.2
  circle w0.025: c10,10 r2.5
  circle w0.025: c-10,-10 r2.5
  pour cut-out: 10,-11.515 ccw(c10,-10) 11.515,-10 ccw(c10,-10) 10,-8.485 ccw(c10,-10) 8.485,-10 ccw(c10,-10)
  pour cut-out: 10,8.485 ccw(c10,10) 11.515,10 ccw(c10,10) 10,11.515 ccw(c10,10) 8.485,10 ccw(c10,10)
  pour cut-out: -10,8.485 ccw(c-10,10) -8.485,10 ccw(c-10,10) -10,11.515 ccw(c-10,10) -11.515,10 ccw(c-10,10)
  pour cut-out: -10,-11.515 ccw(c-10,-10) -8.485,-10 ccw(c-10,-10) -10,-8.485 ccw(c-10,-10) -11.515,-10 ccw(c-10,-10)
  lines w0.01: -12.5,-7 cw(c-11.5,-7) -11.5,-6 -9.1,-6 ccw(c-9.1,-5) -8.1,-5 -8.1,-4.3 ccw(c-9.1,-4.3) -9.1,-3.3 -13.2,-3.3 cw(c-13.2,-2.5) -14,-2.5 -14,2.5 cw(c-13.2,2.5) -13.2,3.3 -9.1,3.3 ccw(c-9.1,4.3) -8.1,4.3 -8.1,5 ccw(c-9.1,5) -9.1,6 -11.5,6 cw(c-11.5,7) -12.5,7 -12.5,7.5
  lines w0.025: -12.5,-7 -12.5,-10 ccw(c-10,-10) -10,-12.5 ; 10,-12.5 ccw(c10,-10) 12.5,-10 ; 10,12.5 cw(c10,10) 12.5,10 12.5,8.342 ; -12.5,7.5 -12.5,10 cw(c-10,10) -10,12.5 -7.75,12.5 cw(c-7.75,12.25) -7.5,12.25 -7.5,12 -7.5,10 cw(c-10,10) -10,7.5 -12.5,7.5
Component Keepout Dwg:
  lines w0.01: -12.5,-7 cw(c-11.5,-7) -11.5,-6 -9.1,-6 ccw(c-9.1,-5) -8.1,-5 -8.1,-4.3 ccw(c-9.1,-4.3) -9.1,-3.3 -13.2,-3.3 cw(c-13.2,-2.5) -14,-2.5 -14,2.5 cw(c-13.2,2.5) -13.2,3.3 -9.1,3.3 ccw(c-9.1,4.3) -8.1,4.3 -8.1,5 ccw(c-9.1,5) -9.1,6 -11.5,6 cw(c-11.5,7) -12.5,7
  lines w0.025: -12.5,-7.018 -12.5,-10 ccw(c-10,-10) -10,-12.5 -7.729,-12.5 10,-12.5 ccw(c10,-10) 12.5,-10 12.5,-7.554 ; -12.5,7.003 -12.5,10 cw(c-10,10) -10,12.5 -7.729,12.5 ; -7.75,12.5 cw(c-7.75,12.25) -7.5,12.25 -7.5,12 ccw(c-6.5,12) -6.656,11.012 ; -6.65,11.015 cw(c-10,10) -7,8.197 -7,-8.197 cw(c-10,-10) -6.646,-11 6.646,-11 cw(c10,-10) 12.503,-7.554 ; 12.5,7.554 12.5,10 ccw(c10,10) 10,12.5 -5.25,12.5 ccw(c-5.25,12.25) -5.5,12.25 -5.5,12 cw(c-6.5,12) -6.5,11 6.646,11 ccw(c10,10) 12.503,7.554
Routing Keepout Dwg:
  lines w0.01: -13.6,-2.468 ccw(c-13.2,-2.468) -13.2,-2.868 -9.3,-2.868 -9.3,2.874 -13.198,2.874 ; -13.6,-2.466 -13.6,2.477 ; -13.6,2.474 cw(c-13.2,2.474) -13.2,2.874
  lines w0.025: -12.5,8.342 ccw(c-10,10) -8.342,12.5 -10,12.5 ccw(c-10,10) -12.5,10 ; -8.342,-12.5 -10,-12.5 cw(c-10,-10) -12.5,-10 -12.5,-8.342 cw(c-10,-10) -8.342,-12.5 ; 8.342,-12.5 cw(c10,-10) 12.5,-8.342 12.5,-10 cw(c10,-10) 10,-12.5 8.342,-12.5 ; 8.342,12.5 ccw(c10,10) 12.5,8.342 12.5,10 ccw(c10,10) 10,12.5 8.342,12.5
Construction:
  circle w0.025: c10,-10 r2.2
  circle w0.025: c10,-10 r1.515
  circle w0.025: c-10,-10 r1.515
  circle w0.025: c-10,-10 r2.2
  circle w0.025: c-10,10 r1.515
  circle w0.025: c-10,10 r2.2
  circle w0.025: c10,10 r1.515
  circle w0.025: c10,10 r2.2
  pour cut-out: 10,-11.515 ccw(c10,-10) 11.515,-10 ccw(c10,-10) 10,-8.485 ccw(c10,-10) 8.485,-10 ccw(c10,-10)
  pour cut-out: -10,-11.515 ccw(c-10,-10) -8.485,-10 ccw(c-10,-10) -10,-8.485 ccw(c-10,-10) -11.515,-10 ccw(c-10,-10)
  pour cut-out: -10,8.485 ccw(c-10,10) -8.485,10 ccw(c-10,10) -10,11.515 ccw(c-10,10) -11.515,10 ccw(c-10,10)
  pour cut-out: 10,8.485 ccw(c10,10) 11.515,10 ccw(c10,10) 10,11.515 ccw(c10,10) 8.485,10 ccw(c10,10)

## Text inside footprints (layer, text, board x,y; h text height)
J1: Mechanical 9 "Jacdac / cable connector  / body" at -18.158,-4.821 h1.7 r90